# Altium PCB ModulesAssembly.PcbDoc
Units mm, origin at the board's own origin, x right, y up, seen from the top; angles counter-clockwise.
Board outline 57 x 96.1 mm, 4 copper layers (Top Layer, (Inserted) Layer 1, (Inserted) Layer 2, Bottom Layer); 18 components, 0 nets, 90 pads, 0 vias.
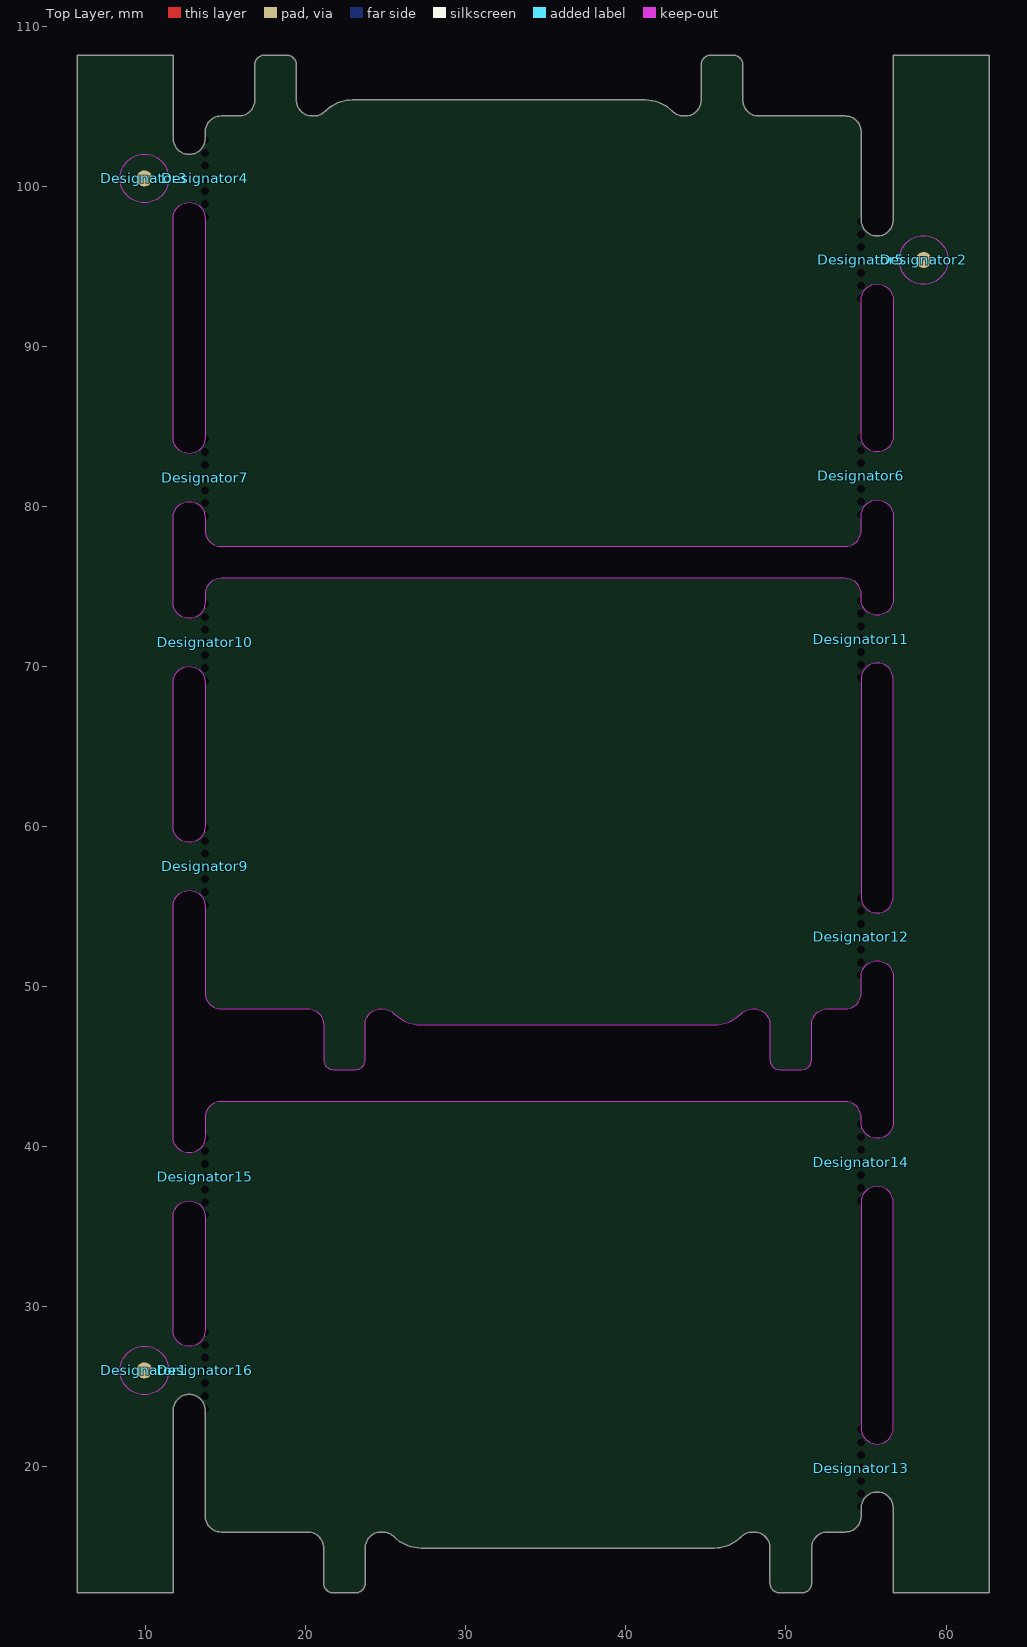
[diagram p0: Top Layer view]
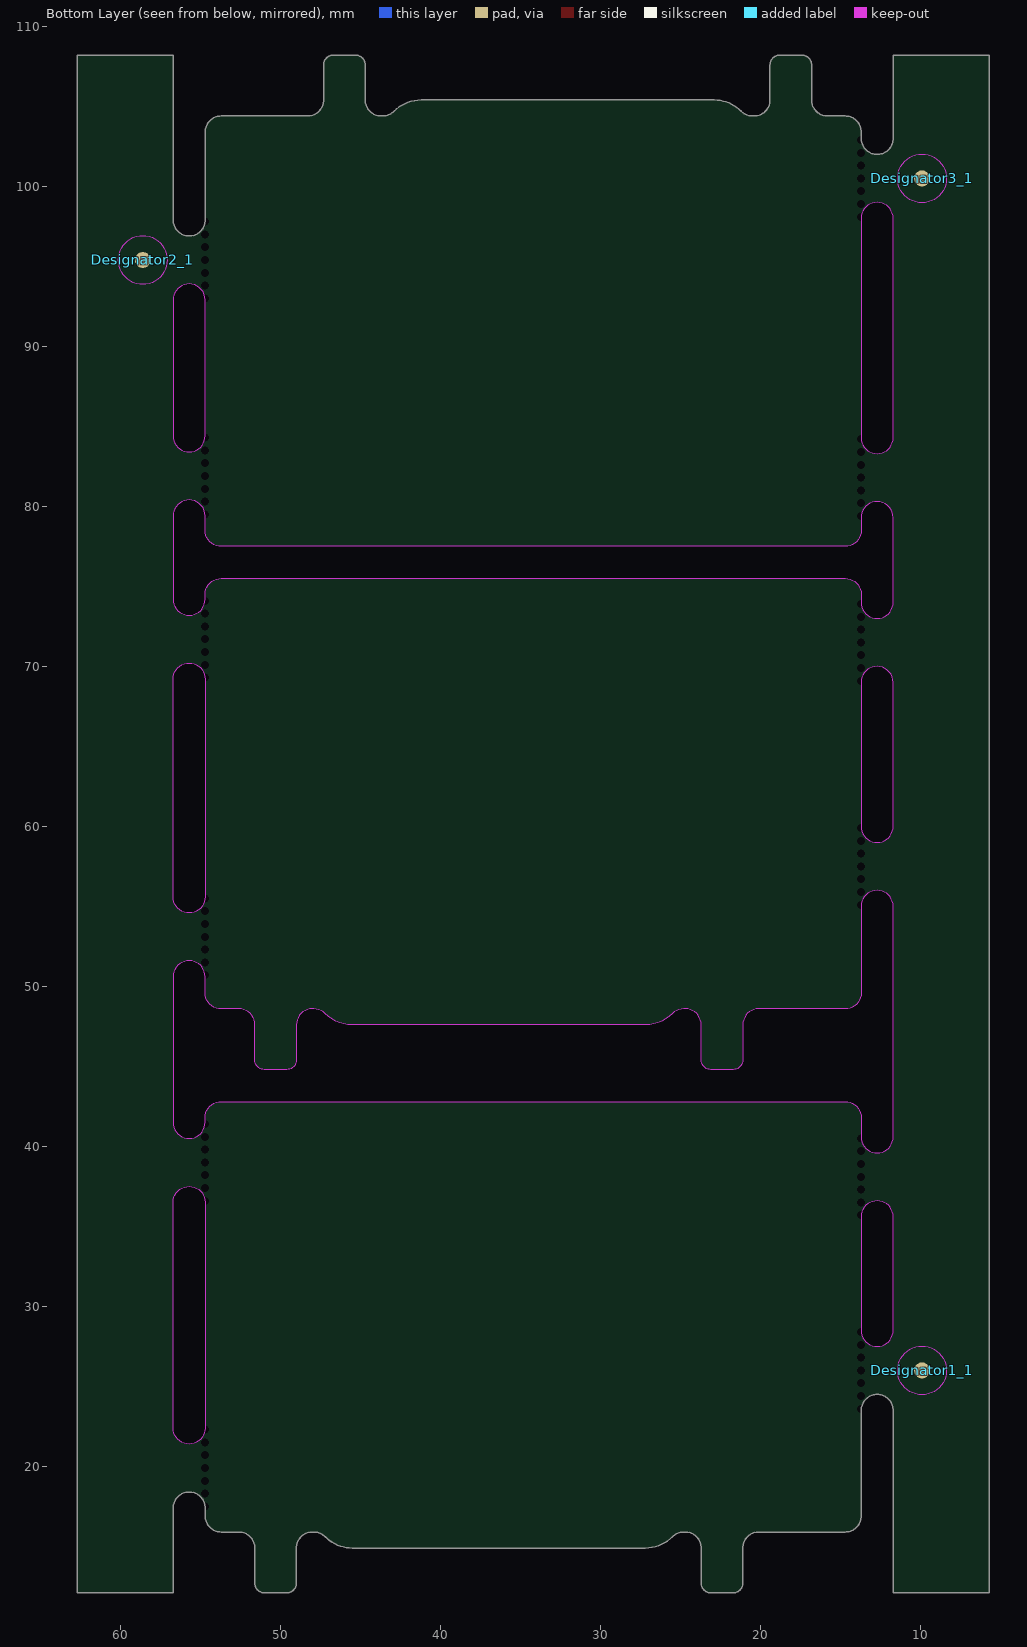
[diagram p1: Bottom Layer view, seen from below]

## Layer stack, top to bottom
Top Solder: solder mask 0.0102, Solder Resist, Dk 3.5
Top Layer: signal copper 0.0356
(Inserted) Dielectric 3: prepreg 0.32, FR-4, Dk 4.8
(Inserted) Layer 1: signal copper 0.0356
(Inserted) Dielectric 2: prepreg 0.32, FR-4, Dk 4.8
(Inserted) Layer 2: signal copper 0.0356
Dielectric 1: dielectric 0.32, FR-4, Dk 4.8
Bottom Layer: signal copper 0.0356
Bottom Solder: solder mask 0.0102, Solder Resist, Dk 3.5

## Board outline
5.7,12.1 11.7,12.1 11.7,23.5 cw(c12.7,23.5) 12.7,24.5 cw(c12.7,23.5) 13.7,23.5 13.7,16.9 ccw(c14.7,16.9) 14.7,15.9 20.1,15.9 cw(c20.1,14.9) 21.1,14.9 21.1,12.7 ccw(c21.7,12.7) 21.7,12.1 23.1,12.1 ccw(c23.1,12.7) 23.7,12.7 23.7,14.9 cw(c24.7,14.9) 24.7,15.9 24.776,15.9 cw(c24.776,14.876) 25.5,15.6 ccw(c27.19,17.29) 27.19,14.9 45.51,14.9 ccw(c45.51,17.29) 47.2,15.6 cw(c47.924,14.876) 47.924,15.9 48,15.9 cw(c48,14.9) 49,14.9 49,12.7 ccw(c49.6,12.7) 49.6,12.1 51,12.1 ccw(c51,12.7) 51.6,12.7 51.6,14.9 cw(c52.6,14.9) 52.6,15.9 53.7,15.9 ccw(c53.7,16.9) 54.7,16.9 54.7,17.4 cw(c55.7,17.4) 55.7,18.4 cw(c55.7,17.4) 56.7,17.4 56.7,12.1 62.7,12.1 62.7,108.2 56.7,108.2 56.7,97.9 cw(c55.7,97.9) 55.7,96.9 cw(c55.7,97.9) 54.7,97.9 54.7,103.4 ccw(c53.7,103.4) 53.7,104.4 48.3,104.4 cw(c48.3,105.4) 47.3,105.4 47.3,107.6 ccw(c46.7,107.6) 46.7,108.2 45.3,108.2 ccw(c45.3,107.6) 44.7,107.6 44.7,105.4 cw(c43.7,105.4) 43.7,104.4 43.624,104.4 cw(c43.624,105.424) 42.9,104.7 ccw(c41.21,103.01) 41.21,105.4 22.89,105.4 ccw(c22.89,103.01) 21.2,104.7 cw(c20.476,105.424) 20.476,104.4 20.4,104.4 cw(c20.4,105.4) 19.4,105.4 19.4,107.6 ccw(c18.8,107.6) 18.8,108.2 17.4,108.2 ccw(c17.4,107.6) 16.8,107.6 16.8,105.4 cw(c15.8,105.4) 15.8,104.4 14.7,104.4 ccw(c14.7,103.4) 13.7,103.4 13.7,103 cw(c12.7,103) 12.7,102 cw(c12.7,103) 11.7,103 11.7,108.2 5.7,108.2
cut-out: 12.7,39.6 cw(c12.7,40.6) 11.7,40.6 11.7,55 cw(c12.7,55) 12.7,56 cw(c12.7,55) 13.7,55 13.7,49.6 ccw(c14.7,49.6) 14.7,48.6 20.1,48.6 cw(c20.1,47.6) 21.1,47.6 21.1,45.4 ccw(c21.7,45.4) 21.7,44.8 23.1,44.8 ccw(c23.1,45.4) 23.7,45.4 23.7,47.6 cw(c24.7,47.6) 24.7,48.6 24.776,48.6 cw(c24.776,47.576) 25.5,48.3 ccw(c27.19,49.99) 27.19,47.6 45.51,47.6 ccw(c45.51,49.99) 47.2,48.3 cw(c47.924,47.576) 47.924,48.6 48,48.6 cw(c48,47.6) 49,47.6 49,45.4 ccw(c49.6,45.4) 49.6,44.8 51,44.8 ccw(c51,45.4) 51.6,45.4 51.6,47.6 cw(c52.6,47.6) 52.6,48.6 53.7,48.6 ccw(c53.7,49.6) 54.7,49.6 54.7,50.6 cw(c55.7,50.6) 55.7,51.6 cw(c55.7,50.6) 56.7,50.6 56.7,41.5 cw(c55.7,41.5) 55.7,40.5 cw(c55.7,41.5) 54.7,41.5 54.7,41.8 ccw(c53.7,41.8) 53.7,42.8 14.7,42.8 ccw(c14.7,41.8) 13.7,41.8 13.7,40.6 cw(c12.7,40.6)
cut-out: 12.7,59 cw(c12.7,60) 11.7,60 11.7,69 cw(c12.7,69) 12.7,70 cw(c12.7,69) 13.7,69 13.7,60 cw(c12.7,60)
cut-out: 12.7,73 cw(c12.7,74) 11.7,74 11.7,79.3 cw(c12.7,79.3) 12.7,80.3 cw(c12.7,79.3) 13.7,79.3 13.7,78.5 ccw(c14.7,78.5) 14.7,77.5 53.7,77.5 ccw(c53.7,78.5) 54.7,78.5 54.7,79.4 cw(c55.7,79.4) 55.7,80.4 cw(c55.7,79.4) 56.7,79.4 56.7,74.2 cw(c55.7,74.2) 55.7,73.2 cw(c55.7,74.2) 54.7,74.2 54.7,74.5 ccw(c53.7,74.5) 53.7,75.5 14.7,75.5 ccw(c14.7,74.5) 13.7,74.5 13.7,74 cw(c12.7,74)
cut-out: 12.7,83.3 cw(c12.7,84.3) 11.7,84.3 11.7,98 cw(c12.7,98) 12.7,99 cw(c12.7,98) 13.7,98 13.7,84.3 cw(c12.7,84.3)
cut-out: 55.7,83.4 cw(c55.7,84.4) 54.7,84.4 54.7,92.9 cw(c55.7,92.9) 55.7,93.9 cw(c55.7,92.9) 56.7,92.9 56.7,84.4 cw(c55.7,84.4)
cut-out: 54.7,55.6 ccw(c55.7,55.6) 55.7,54.6 ccw(c55.7,55.6) 56.7,55.6 56.7,69.2 ccw(c55.7,69.2) 55.7,70.2 ccw(c55.7,69.2) 54.7,69.2
cut-out: 54.7,22.4 ccw(c55.7,22.4) 55.7,21.4 ccw(c55.7,22.4) 56.7,22.4 56.7,36.5 ccw(c55.7,36.5) 55.7,37.5 ccw(c55.7,36.5) 54.7,36.5
cut-out: 12.7,27.5 cw(c12.7,28.5) 11.7,28.5 11.7,35.6 cw(c12.7,35.6) 12.7,36.6 cw(c12.7,35.6) 13.7,35.6 13.7,28.5 cw(c12.7,28.5)

## Design rules (kind name [scope] priority, off if disabled: settings)
Clearance [All] p1: gap=0.254 ignorepadtopadclearanceinfootprint=FALSE
PolygonConnect [All] p1: connectstyle=Relief reliefconductorwidth=0.254 reliefentries=4 polygonreliefangle="90 Angle" airgapwidth=0.254
RoutingVias [All] p1: holewidth=0.711 width=1.27 viastyle="Through Hole" minholewidth=0.711 minwidth=1.27 maxholewidth=0.711 maxwidth=1.27
SolderMaskExpansion [All] p1: expansion=0.102 istentingtop=FALSE
Width [All] p1: maxlimit=0.254 minlimit=0.254 preferedwidth=0.254
30 further rules are at their usual default settings.

## Components (designator, comment, footprint, x,y, rotation, side; value= is the part's Value field where it differs from the comment)
Designator1 "Comment" FIDUCIAL 9.9,26 r0 top
Designator1_1 "Comment" FIDUCIAL 9.9,26 r180 bottom
Designator2 "Comment" FIDUCIAL 58.6,95.4 r0 top
Designator2_1 "Comment" FIDUCIAL 58.6,95.4 r180 bottom
Designator3 "Comment" FIDUCIAL 9.9,100.5 r0 top
Designator3_1 "Comment" FIDUCIAL 9.9,100.5 r180 bottom
Designator4 "Comment" Bridge_2mm_1s 13.7,100.5 r270 top
Designator5 "Comment" Bridge_2mm_1s 54.7,95.4 r90 top
Designator6 "Comment" Bridge_2mm_1s 54.7,81.9 r90 top
Designator7 "Comment" Bridge_2mm_1s 13.7,81.8 r270 top
Designator9 "Comment" Bridge_2mm_1s 13.7,57.5 r270 top
Designator10 "Comment" Bridge_2mm_1s 13.7,71.5 r270 top
Designator11 "Comment" Bridge_2mm_1s 54.7,71.7 r90 top
Designator12 "Comment" Bridge_2mm_1s 54.7,53.1 r90 top
Designator13 "Comment" Bridge_2mm_1s 54.7,19.9 r90 top
Designator14 "Comment" Bridge_2mm_1s 54.7,39 r90 top
Designator15 "Comment" Bridge_2mm_1s 13.7,38.1 r270 top
Designator16 "Comment" Bridge_2mm_1s 13.7,26 r270 top

## Footprints (in the part's own frame and the unit in brackets; to place one, negate y for a bottom-side part, rotate by r counter-clockwise, add the part's x,y. Pads: shape width x height; smd on the part's side, far side on the other; paste and mask are expansions set on the pad)
Bridge_2mm_1s [mm]
  round 0 hole 0.5 unplated: 14(0,0) 15(-2.4,0) 15(-1.6,0) 15(-0.8,0) 15(0.8,0) 15(1.6,0) 15(2.4,0)
FIDUCIAL [mm]
  round 1 smd paste+0 mask+1: 1(0,0)
  Top Layer keep-out region: 0,1.524 0.583,1.408 1.078,1.078 1.408,0.583 1.524,0 1.524,0 1.408,-0.583 1.078,-1.078 0.583,-1.408 0,-1.524 0,-1.524 -0.583,-1.408 -1.078,-1.078 -1.408,-0.583 -1.524,0 -1.524,0 -1.408,0.583 -1.078,1.078 -0.583,1.408 0,1.524

## Nets (pads, with @x,y where several pads share a name; then routed paths per layer and width w, separated by ;. In a path a pad name is that pad's centre, name@x,y a point inside that pad or via, vN(x,y) a via of type N, cw(c..) or ccw(c..) an arc to the next point about the centre after c; other vN are vias at no path point)
pads on no net: Designator1.1 Designator1_1.1 Designator2.1 Designator2_1.1 Designator3.1 Designator3_1.1 Designator4.14 Designator4.15 Designator5.14 Designator5.15 Designator6.14 Designator6.15 Designator7.14 Designator7.15 Designator9.14 Designator9.15 Designator10.14 Designator10.15 Designator11.14 Designator11.15 Designator12.14 Designator12.15 Designator13.14 Designator13.15 Designator14.14 Designator14.15 Designator15.14 Designator15.15 Designator16.14 Designator16.15

## Silkscreen, mask and mechanical layers (free items; w line width, h text height)
Board (Mech100):
  drawing of 190 lines, arcs and shapes, not listed

## Panel: embedded boards
"..\Module2\Module2.PcbDoc" at 13.7,44.8, 1 rows x 1 columns, spacing 63.5 x 38.1, rotation 0
"..\Module2\Module2.PcbDoc" at 13.7,12.1, 1 rows x 1 columns, spacing 63.5 x 38.1, rotation 0
"..\Module1\Module1.PcbDoc" at 54.7,108.2, 1 rows x 1 columns, spacing 63.5 x 38.1, rotation 180